# Altium PCB J-Link.PcbDoc
Units mm, origin at the board's own origin, x right, y up, seen from the top; angles counter-clockwise.
Board outline 33.28 x 17.39 mm, 2 copper layers (Top Layer, Bottom Layer); 33 components, 29 nets, 129 pads, 160 vias.
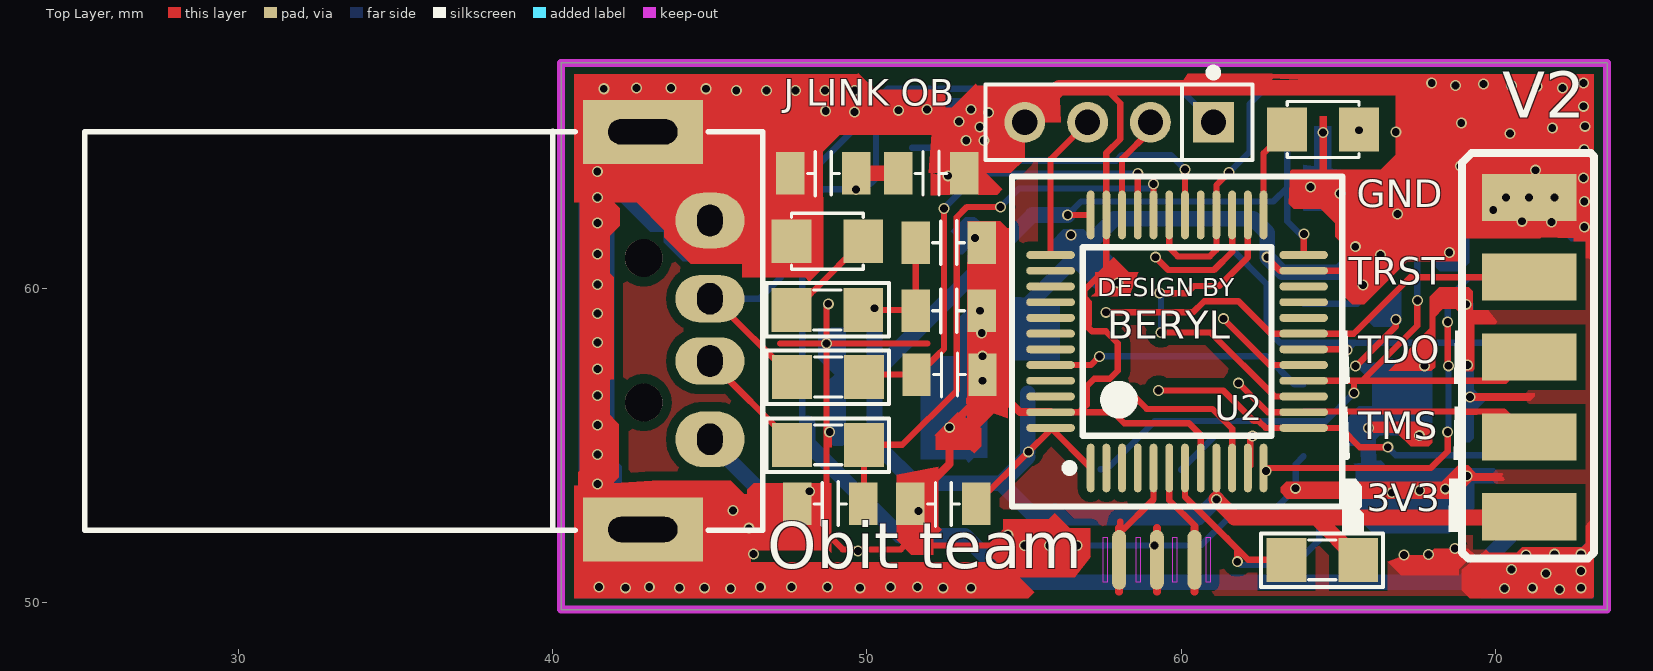
[diagram p0: Top Layer view]
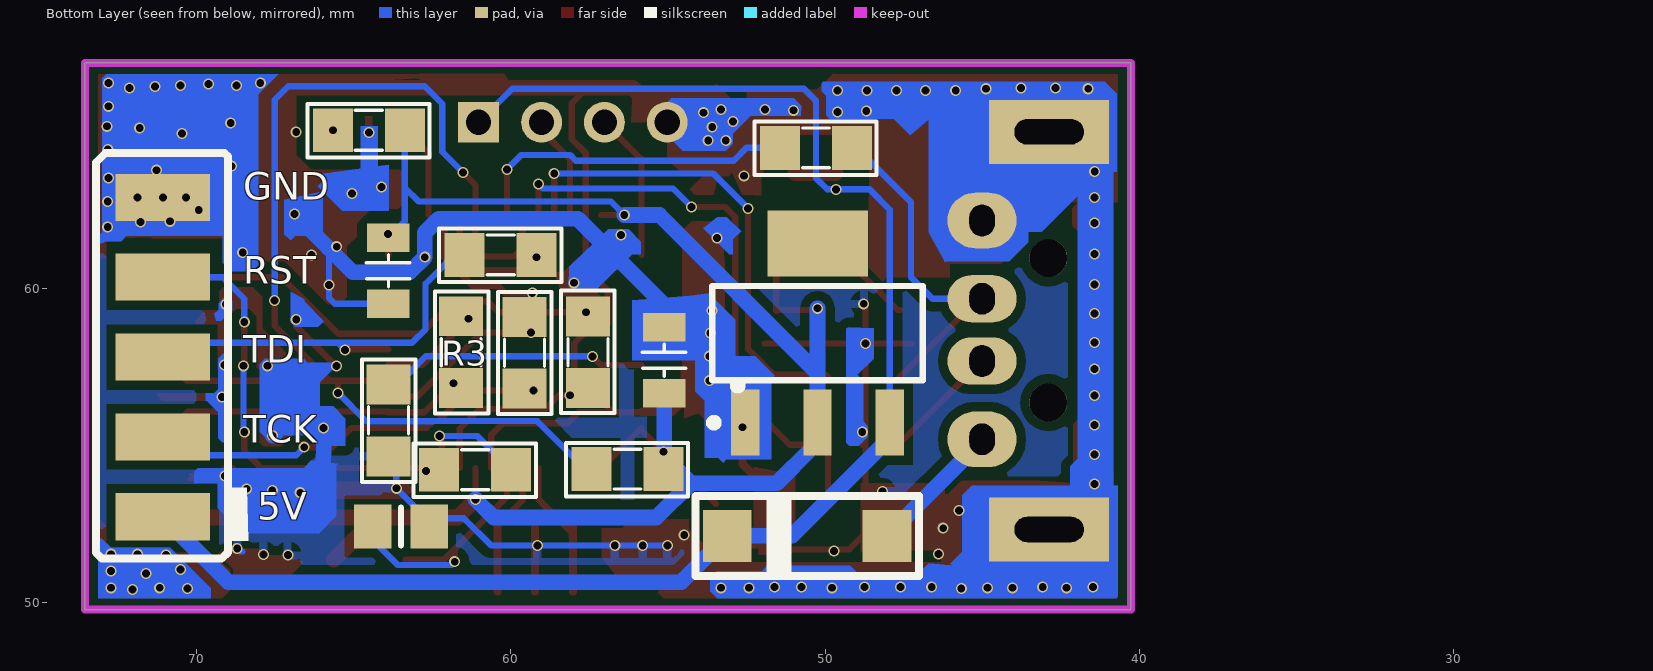
[diagram p1: Bottom Layer view, seen from below]

## Layer stack, top to bottom
Top Solder: solder mask 0.0102, Solder Resist, Dk 3.5
Top Layer: signal copper 0.0356
Dielectric 1: dielectric 0.32, FR-4, Dk 4.8
Bottom Layer: signal copper 0.0356
Bottom Solder: solder mask 0.0102, Solder Resist, Dk 3.5

## Board outline
40.277,49.776 73.553,49.776 73.553,67.17 40.277,67.17

## Design rules (kind name [scope] priority, off if disabled: settings)
Clearance [All] p1: gap=0.2 ignorepadtopadclearanceinfootprint=FALSE
PolygonConnect [All] p1: connectstyle=Relief reliefconductorwidth=0.254 reliefentries=4 polygonreliefangle="90 Angle" airgapwidth=0.254
RoutingVias [All] p1: holewidth=0.25 width=0.35 viastyle="Through Hole" minholewidth=0.25 minwidth=0.35 maxholewidth=0.25 maxwidth=0.35
SolderMaskExpansion [All] p1: expansion=0.102
Width [All] p1: maxlimit=0.8 minlimit=0.2 preferedwidth=0.5
30 further rules are at their usual default settings.

## Classes and differential pairs
component class "J-Link OB": R3 U2

## Components (designator, comment, footprint, x,y, rotation, side; value= is the part's Value field where it differs from the comment)
C1 "CAP" "C 0805" 48.616,63.652 r180 top value=0.1
C2 "CAP" "C 0805" 52.045,63.652 r0 top value=0.1
C3 "CAP" "C 0805" 52.603,61.443 r0 top value=0.1
C4 "CAP" "C 0805" 52.434,53.137 r180 top value=0.1
C5 "CAP" "C 0805" 48.836,53.137 r0 top value=0.1
C6 "CAP" "C 0805" 52.629,57.252 r180 top value=0.1
C7 "CAP" "C 0805" 55.118,57.709 r90 bottom value=0.1
C8 "JP4x1-2.0" J4-C1T 58.023,65.278 r180 top
C9 "CAP" "C 0805" 52.603,59.284 r180 top value=0.1
C10 "CAP" "C 0805 INSTEK" 63.492,52.417 r0 bottom value=0.1
C11 "CAP" "C 0805" 63.895,60.555 r90 bottom value=0.1
D1 "SS24" DO-214AC 50.571,52.121 r0 bottom
H1 "Conn5" CONN5 65.837,50.394 r0 top
H2 "Conn5" CONN5 76.302,50.394 r180 bottom
LED1 "LED SMD" SM-LED-0805-Blue 49.886,61.493 r180 top
LED2 "LED SMD" SM-LED-0805-Blue 65.659,65.049 r180 top
P? "USB" "USB TYPE-A Plug" 43.942,58.649 r90 top
R1 "100" SM-RES-0805 57.545,59.106 r270 bottom
R2 "100" SM-RES-0805 61.468,61.062 r180 bottom
R3 "100" SM-RES-0805 61.579,56.821 r90 bottom
R4 "10k" SM-RES-0805 49.886,59.309 r180 top
R5 "100" SM-RES-0805 59.562,56.804 r90 bottom
R6 "100" SM-RES-0805 62.28,54.223 r180 bottom
R7 "47k" SM-RES-0805 57.432,54.244 r180 bottom
R7 "100" SM-RES-0805 47.625,55.016 r0 top
R8 "100" SM-RES-0805 47.625,57.175 r0 top
R9 "1.5K" SM-RES-0805 51.435,64.465 r180 bottom
R10 "10k" SM-RES-0805 63.348,51.359 r0 top
R11 "10k" SM-RES-0805 65.659,65.024 r180 bottom
R70 "100" SM-RES-0805 63.89,54.651 r90 bottom
U1 "AMS1117" "SOT 223" 50.241,58.572 r180 bottom
U2 "STM32F103xx_LQFP48" LQFP48 59.87,58.305 r0 top
Y1 "" RESONATOR-SMD-3.2X1.3 59.227,51.359 r0 top

## Footprints (in the part's own frame and the unit in brackets; to place one, negate y for a bottom-side part, rotate by r counter-clockwise, add the part's x,y. Pads: shape width x height; smd on the part's side, far side on the other; paste and mask are expansions set on the pad)
"C 0805" [mm]
  rect 0.9x1.35 smd: 1(-1.05,0) 2(1.05,0)
  silkscreen extent -0.51,-0.69 0.51,0.71, body extent -1,-0.63 1,0.64, height 0.57
"C 0805 INSTEK" [mm] "Copy-From-IST-Lib"
  rect 1.2x1.4 smd: 1(-0.9,0) 2(0.9,0)
  silkscreen extent 0,-0.6 0,0.6, body extent -1,-0.63 1,0.64, height 0.57
CONN5 [mm]
  rect 3x1.5 smd: 1(5.232,2.337) 2(5.232,4.877) 3(5.232,7.417) 4(5.232,9.957) 5(5.232,12.497)
  silkscreen extent 3.1,1 7.3,13.9
DO-214AC [mm]
  rect 1.55x1.65 smd: 1(-2.54,0) 2(2.54,0)
  silkscreen extent -3.56,-1.27 3.56,1.27, body extent -2.59,-1.29 2.61,1.31, height 2.4
J4-C1T [mm] "4p, 1 row, straight, gold plating"
  rect 1.3x1.3 hole 0.8: 1(-3,0)
  round 1.3 hole 0.8: 2(-1,0) 3(1,0) 4(3,0)
  silkscreen extent -4.25,-1.71 4.25,1.2, body extent -4.25,-1.2 4.25,1.2, height 4.31
LQFP48 [mm]
  oval 0.25x1.55 smd: 1(-2.75,-4.025) 2(-2.25,-4.025) 3(-1.75,-4.025) 4(-1.25,-4.025) 5(-0.75,-4.025) 6(-0.25,-4.025) 7(0.25,-4.025) 8(0.75,-4.025) 9(1.25,-4.025) 10(1.75,-4.025) 11(2.25,-4.025) 12(2.75,-4.025) 25(2.75,4.025) 26(2.25,4.025) 27(1.75,4.025) 28(1.25,4.025) 29(0.75,4.025) 30(0.25,4.025) 31(-0.25,4.025) 32(-0.75,4.025) 33(-1.25,4.025) 34(-1.75,4.025) 35(-2.25,4.025) 36(-2.75,4.025)
  oval 1.55x0.25 smd: 13(4.025,-2.75) 14(4.025,-2.25) 15(4.025,-1.75) 16(4.025,-1.25) 17(4.025,-0.75) 18(4.025,-0.25) 19(4.025,0.25) 20(4.025,0.75) 21(4.025,1.25) 22(4.025,1.75) 23(4.025,2.25) 24(4.025,2.75) 37(-4.025,2.75) 38(-4.025,2.25) 39(-4.025,1.75) 40(-4.025,1.25) 41(-4.025,0.75) 42(-4.025,0.25) 43(-4.025,-0.25) 44(-4.025,-0.75) 45(-4.025,-1.25) 46(-4.025,-1.75) 47(-4.025,-2.25) 48(-4.025,-2.75)
  silkscreen extent -5.25,-5.25 5.25,5.25, body extent -4.5,-4.5 4.5,4.5, height 1.5
RESONATOR-SMD-3.2X1.3 [mm]
  rrect100% 0.45x1.905 smd: 1(-1.2,0) 2(0,0) 3(1.2,0)
  Top Layer lines w0.254: -1.2,-1.016 -1.2,0 -1.2,0.533 -1.2,0.654 -1.2,0.813 -1.2,1.016 ; 0,-1.016 0,0 0,0.203 0,0.254 0,0.457 0,0.762 0,1.016 ; 1.2,-1.016 1.2,0 1.2,1.016
  Top Layer keep-out region: -1.702,-0.711 -1.702,0.711 -1.575,0.711 -1.575,-0.711
  Top Layer keep-out region: -0.66,-0.711 -0.66,0.711 -0.533,0.711 -0.533,-0.711
  Top Layer keep-out region: 0.508,-0.711 0.508,0.711 0.635,0.711 0.635,-0.711
  Top Layer keep-out region: 1.575,-0.711 1.575,0.711 1.702,0.711 1.702,-0.711
SM-LED-0805-Blue [mil]
  rect 50x55 smd: 1(0,0) 2(90,0)
  silkscreen extent 0,-35 90,35, body extent 5,-25 85,25, height 43
SM-RES-0805 [mil]
  rect 50x55 smd: 1(0,0) 2(90,0)
  silkscreen extent -32,-34 121,33, body extent 6,-25 84,25, height 31
"SOT 223" [mm]
  rect 0.9x2.1 smd: 1(-2.3,-2.85) 2(0,-2.85) 3(2.3,-2.85)
  rect 3.2x2.1 smd: 4(0,2.85)
  silkscreen extent -3.43,-2.97 3.35,1.5, body extent -3.25,-3.66 3.25,3.3, height 1.66
"USB TYPE-A Plug" [mil] "http://www.google.com/imgres?imgurl=http://ntcdistributing.com/wp-content/uploads/2013/06/ura-1001r.jpg&imgrefurl=http://ntcdistributing.com/product/upa-1001r/&h=468&w=576&tbnid=tjgdQPVHuRbmKM:&zoom=1&docid=JG2J_tnvzre7yM&ei=efmdVfbbF8OwuAS-grugDA&tbm=isch&ved=0CCMQMygHMAc"
  oval 70x86.61 hole 31.5 slot 39.37 at 0 deg: 1(-136,-42) 4(138,-42)
  oval 59.06x86.61 hole 31.5 slot 39.37 at 0 deg: 2(-38,-42) 3(40,-42)
  rect 80x150 hole 31.5 slot 86.61 at 90 deg: 5(-249,42) 6(249,42)
  round 47.24 hole 47.24: H(-90,41) H(91,41)
  silkscreen extent -250,-108 250,741, body extent -247,-47 249,737, height 130

## Part data
C1 C2 C3 C4 C5 C6 C7 C9 C10 C11: library part CAP_NP
C8: "WR-PHD 2.00 mm Socket Header", Manufacturer="Würth Elektronik eiSos GmbH", partNo=62000411821, ComponentLink1 Description=Manufacturer, ComponentLink1URL=http://www.we-online.com, ComponentLink2 Description=Datasheet, ComponentLink2URL=http://katalog.we-online.de/em/datasheet/6200xx11821.pdf, Created by="Karrer Zheng", Created Date="2 April 2013", NoPins=04
D1: library part "Diode Schottky", "Diode Schottky", Part Number="LED 3 ly Single Colour"
LED1 LED2: library part "LED SMD 0805"
R1 R2 R3 R4 R5 R6 R7 R7 R8 R9 R10 R11 R70: library part "Res SMD", "Res"
U1: library part AMS117
U2: "STM32 ARM-based 32-bit MCU with 64 Kbytes Flash, 48-pin LQFP, Industrial Temperature", ComponentLink1Description="Manufacturer Link", ComponentLink1URL=www.st.com/stm32, ComponentLink2Description=Datasheet, ComponentLink2URL=http://www.st.com/stonline/products/literature/ds/13587.pdf, DatasheetVersion="rev6, Mar-2008", PackageDescription="48-Pin Low-Profile Quad Flat Pack, 7 x 7 mm Body, 0.5 mm Pitch (LQFP48)", PackageReference=LQFP48, PackageVersion=Mar-2008, Published=30-May-2008, Publisher="Altium Limited"
Y1: library part RESONATOR-8MHZSMD_3.2X1.3, PROD_ID=XTAL-08895

## Via types
v1: diameter 0.35, hole 0.25, Top Layer to Bottom Layer, tented both sides, 160 vias

## Nets (pads, with @x,y where several pads share a name; then routed paths per layer and width w, separated by ;. In a path a pad name is that pad's centre, name@x,y a point inside that pad or via, vN(x,y) a via of type N, cw(c..) or ccw(c..) an arc to the next point about the centre after c; other vN are vias at no path point)
5V: C1.1 C2.1 C8.1 D1.2 H2.1 U1.3 | length 51
  Top Layer w0.2: C2.1@50.944,63.652 50.969,63.678 C2.1
  Top Layer w0.5: C1.1 C2.1@50.944,63.652
  Bottom Layer w0.2: U1.3@47.941,55.717 U1.3 47.941,62.495 48.59,63.144 v1(49.657,63.144) 49.936,63.144 50.292,63.5 50.292,65.964 50.673,66.345 59.956,66.345 C8.1
  Bottom Layer w0.5: U1.3@48.119,55.702 48.119,55.056 51.054,52.121 D1.2 54.588,50.644 68.983,50.644 H2.1
GND: C1.2 C2.2 C3.2 C4.2 C5.1 C6.1 C7.2 C8.4 C9.1 C10.1 C11.1 H1.5 H2.5 LED1.2 P?.4 P?.5 P?.6 R70.1 U1.1 U2.8 U2.23 U2.35 U2.47 Y1.2 | length 181.8
  Top Layer w0.2: 47.243,58.242 v1(48.717,58.242) ; C5.1 49.233,51.689 51.079,51.689 51.079,51.691 51.384,51.996 ; 48.635,53.695 48.717,53.777 v1@48.717,55.524 ; v1(48.773,59.503) 48.717,59.447 v1(48.717,58.242) ; v1(48.819,55.423) v1@48.717,55.524 ; C4.2 51.384,51.996 ; 51.927,58.242 v1(48.717,58.242) ; C2.2 53.397,63.652 C8.4 ; v1(53.605,59.284) C9.1 ; C6.1@53.653,57.861 v1(53.679,57.836) C6.1 v1(53.679,57.057) ; v1(55.016,51.816) 51.206,51.816 51.384,51.994 51.384,51.996 ; U2.47 56.766,56.055 ; 57.607,66.345 58.064,65.888 58.064,64.745 57.62,64.301 U2.35 57.62,60.63 56.921,59.93 56.921,58.872 57.163,58.63 57.606,58.63 57.985,58.251 57.985,57.375 57.732,57.122 57.239,57.122 56.998,56.881 56.998,56.286 56.766,56.055 ; U2.8 60.62,55.331 60.249,55.702 58.191,55.702 57.839,56.055 56.766,56.055 ; v1(62.738,60.985) 62.738,60.961 63.144,60.555 U2.23 65.914,60.555 ; v1(65.547,57.53) 65.577,57.53 66.827,58.78 v1(66.827,59.004) ; v1(65.786,60.096) 65.786,60.427 65.914,60.555 ; v1(66.339,61.061) v1@66.456,61.178 ; v1@66.38,61.02 65.914,60.555 ; 66.456,61.359 v1@66.456,61.178 ; v1@66.458,61.18 v1@66.456,61.178 ; v1@48.717,55.524 v1(48.717,58.242)
  Top Layer w0.254: C1.2 47.566,61.527 LED1.2 ; C4.2@51.359,53.137 52.626,54.404 v1(52.626,55.575) 53.679,56.628 v1(53.679,57.057) ; C3.2 C9.1 v1(53.653,58.572) 53.653,57.861 53.653,57.277 C6.1 54.876,56.055 U2.47
  Top Layer w0.5: P?.4 46.507,63.652 C1.2 49.191,65.278 49.354,65.441 ; C8.4 56.123,66.378 67.582,66.378 v1(71.069,62.89) 70.536,62.357 v1(66.878,62.357) ; v1(65.538,61.32) 65.538,61.89
  Top Layer w0.8: P?.5 v1(41.427,53.772) v1(41.427,54.712) v1(41.427,55.651) v1(41.427,56.591) v1(41.427,57.429) v1(41.427,58.268) v1(41.427,59.195) v1(41.427,60.122) v1(41.427,61.087) v1(41.427,62.078) v1(41.427,62.89) 41.427,63.705 v1(41.424,63.708) 41.61,63.708 P?.6 ; P?.4 45.009,62.84 P?.6 ; v1@46.711,66.294 v1(46.812,66.294) ; v1@47.65,66.294 v1(47.727,66.294) ; 49.191,65.278 53.594,65.278 C8.4 ; 49.354,65.441 43.343,65.441 P?.6
  Bottom Layer w0.2: v1@49.606,65.532 v1(49.606,65.608) ; v1(53.162,64.694) v1@53.238,64.694 ; v1(55.016,51.816) v1(55.804,51.816) v1(56.693,51.816) v1(59.157,51.816) 60.63,51.816 61.493,52.68 62.687,52.68 v1(63.641,53.634) 63.641,54.402 R70.1 ; C11.1 65.601,59.505 65.786,59.69 v1(65.786,60.096) 65.786,61.265 65.802,61.28 ; v1(65.547,57.53) v1(67.742,57.531) v1(67.742,57.531) ; 68.534,51.625 68.611,51.625 v1(68.704,51.718) ; v1@70.46,51.054 v1(70.51,51.054) ; v1(71.323,66.421) v1@71.349,66.421 ; v1(72.822,64.414) v1@72.822,64.44
  Bottom Layer w0.5: U1.1@52.719,55.702 52.719,56.732 54.746,58.759 C7.2 55.118,59.461 57.867,62.21 62.289,62.21 62.738,61.761 v1(62.738,60.985) 63.221,60.503 65.024,60.503 65.786,61.265 ; 65.802,61.28 v1(66.878,62.357) ; 65.964,54.469 65.964,54.666 65.948,54.681 65.948,55.534 v1(65.964,55.55) 65.979,55.565 67.317,55.565 v1(67.575,55.307) ; v1(70.333,62.89) v1(69.926,62.484) 70.663,62.484 v1(71.069,62.89) v1(71.882,62.89)
  Bottom Layer w0.8: P?.5 41.58,53.619 41.58,54.712 41.58,57.429 41.58,59.195 41.58,62.078 41.58,63.552 v1(41.424,63.708) 41.61,63.708 P?.6 45.009,62.84 P?.4
  other v1: 72.034,50.419 45.669,50.444 70.282,50.444 42.316,50.47 44.044,50.47 44.831,50.47 49.784,50.47 52.426,50.47 53.315,50.47 71.171,50.47 72.72,50.47 41.478,50.495 43.078,50.495 46.609,50.495 47.6,50.495 48.743,50.495 50.749,50.495 51.613,50.495 71.603,50.927 72.72,51.003 67.089,51.509 70.968,51.511 46.39,51.54 67.87,51.532 71.882,51.537 72.72,51.537 49.715,51.642 54.483,52.146 46.243,52.363 51.638,52.908 45.743,52.923 66.7,53.492 48.177,53.538 67.589,53.569 68.402,53.619 69.088,54.026 69.19,56.54 69.113,57.556 69.063,59.487 57.988,60.173 68.529,61.138 53.442,61.595 56.49,61.697 72.823,61.949 71.78,62.103 70.841,62.128 72.823,62.763 65.049,63.017 64.11,63.221 72.796,63.5 52.578,63.576 71.272,63.754 68.885,63.881 53.721,64.694 70.46,64.922 64.516,64.948 66.827,64.973 71.806,65.1 53.594,65.126 72.847,65.151 68.91,65.253 52.934,65.303 53.873,65.583 48.692,65.634 51.003,65.659 51.918,65.684 53.315,65.684 72.796,65.786 45.847,66.294 48.666,66.294 49.606,66.294 41.631,66.345 44.882,66.345 42.672,66.37 43.764,66.37 72.136,66.37 68.732,66.446 70.51,66.446 69.621,66.497 67.97,66.523 72.796,66.523
LED: LED2.2 U2.25 | length 3
  Top Layer w0.2: U2.25 62.62,64.297 LED2.2
NetC10_2: C10.2 R10.1 U2.7 | length 8.8
  Top Layer w0.2: U2.7 60.12,53.367 61.443,52.045 ; 61.468,52.045 61.443,52.045 ; v1(61.785,51.298) 61.785,51.702 ; R10.1 62.128,51.359 61.785,51.702 ; 61.443,52.045 61.785,51.702
  Bottom Layer w0.2: v1(61.785,51.298) 61.889,51.194 63.598,51.194 64.392,51.988 C10.2
NetD1_1: D1.1 P?.1 | length 4.7
  Top Layer w0.3: P?.1@45.009,54.813 P?.1
  Bottom Layer w0.3: P?.1@45.009,55.143 P?.1
  Bottom Layer w0.5: P?.1@45.009,55.143 D1.1
NetLED1_1: LED1.1 R4.2 | length 3.2
  Top Layer w0.2: R4.2 47.701,59.309 48.242,59.85 48.242,59.908 48.291,59.908 49.877,61.493 LED1.1
NetLED2_1: LED2.1 R11.1 | length 0
  Top Layer w0.2: v1(65.659,65.024) LED2.1
NetP?_2: P?.2 R7.1@47.625,55.016 | length 3.8
  Top Layer w0.2: P?.2 47.625,55.067 R7.1@47.625,55.016
NetP?_3: P?.3 R8.1 R9.2 | length 11.8
  Top Layer w0.2: P?.3 45.136,59.665 R8.1
  Bottom Layer w0.2: P?.3 46.584,59.665 47.269,60.35 47.269,62.738 R9.2@49.517,64.986
NetR70_2: R70.2 U2.44 | length 8.5
  Top Layer w0.2: U2.44 57.123,57.555 v1(57.398,57.83)
  Bottom Layer w0.2: v1@57.396,57.835 62.708,57.835 63.606,56.937 R70.2
OSC0: U2.6 Y1.3 | length 2.2
  Top Layer w0.2: U2.6 59.62,53.257 60.455,52.423
OSC1: U2.5 Y1.1 | length 2.8
  Top Layer w0.2: Y1.1@58.058,52.095 58.058,52.216 59.12,53.278 U2.5 ; 58.058,52.375 58.058,52.578
SWDCLK_IN: C8.3 U2.37 | length 4.7
  Top Layer w0.2: U2.37 55.845,64.1 C8.3
"SWDIO IN": C8.2 U2.34 | length 3.3
  Top Layer w0.2: U2.34 58.12,64.115 59.023,65.017 C8.2
"TCK I": H2.2 R5.1 U2.13 | length 12.9
  Top Layer w0.2: v1(59.284,56.744) 61.345,56.744 62.317,55.772 62.469,55.772 62.686,55.555 U2.13 65.07,55.555 65.684,54.94 v1(66.573,54.94)
  Bottom Layer w0.2: v1(66.573,54.94) 66.827,54.686 70.485,54.686 H2.2
"TCK O": R5.2 U2.15 U2.26 | length 11.3
  Top Layer w0.2: v1(59.316,59.843) 60.173,59.843 60.401,60.071 61.214,60.071 62.12,60.977 U2.26 ; v1(59.358,58.588) 60.94,58.588 62.973,56.555 U2.15
  Bottom Layer w0.2: v1(59.316,59.843) 59.309,59.836 59.358,59.787 v1(59.358,58.588)
"TDI I": H2.3 R2.1 U2.18 | length 13.6
  Top Layer w0.2: U2.18 65.262,58.055 v1(65.278,58.039)
  Bottom Layer w0.2: R2.1@61.493,61.29 61.57,61.29 62.713,60.147 62.713,58.699 63.144,58.268 65.507,58.268 ; v1(65.278,58.039) 65.507,58.268 ; H2.3@70.587,58.293 H2.3@70.612,58.268 ; H2.3 H2.3@70.612,58.268 ; 65.507,58.268 H2.3@70.612,58.268
"TDI O": R2.2 U2.27 | length 4
  Top Layer w0.2: v1(59.182,60.985) 59.588,60.579 61.043,60.579 61.62,61.156 U2.27
"TDO I": H1.3 R7.1@57.432,54.244 U2.16 U2.28 U2.31 | length 40.2
  Top Layer w0.2: U2.31 59.62,61.284 59.893,61.011 60.909,61.011 61.12,61.222 U2.28 61.12,63.279 v1(61.519,63.678) ; U2.16 65.499,57.055 ; v1(65.499,56.67) 65.499,57.055 ; v1(67.513,59.614) 67.513,58.807 65.761,57.055 ; H1.3 70.314,57.055 65.761,57.055 ; 65.499,57.055 65.761,57.055
  Bottom Layer w0.2: R7.1@57.432,54.244 57.633,54.244 59.161,55.772 62.469,55.772 62.476,55.765 64.594,55.765 v1(65.499,56.67) ; v1(61.519,63.678) 62.179,64.338 62.179,65.862 62.738,66.421 67.081,66.421 67.513,65.989 v1(67.513,59.614)
"TMS I": H1.2 R3.1 U2.14 | length 10
  Top Layer w0.2: v1(61.824,56.977) 61.83,56.977 62.752,56.055 U2.14 63.916,56.076 68.983,56.076 68.993,56.065 69.386,56.065 69.397,56.076 70.264,56.076 H1.2
"TMS O": R3.2 U2.17 | length 3.2
  Top Layer w0.2: v1(61.341,59.03) 62.816,57.555 U2.17
"TRES I": H2.4 R6.1 U2.12 | length 14
  Top Layer w0.2: U2.12 v1@62.814,54.28 ; v1(62.695,54.182) 62.717,54.182 v1@62.814,54.28 ; v1(68.478,55.423) 68.478,54.813 67.945,54.28 v1@62.814,54.28 ; v1(68.478,58.928) 68.478,57.556 v1(68.504,57.531)
  Bottom Layer w0.2: v1(68.478,55.423) 68.504,55.448 v1(68.504,57.531) ; v1(68.478,58.928) 68.478,59.665 69.164,60.35 H2.4
"TRES O": R6.2 U2.11 | length 3.8
  Top Layer w0.2: U2.11 62.195,54.356 62.195,55.22 v1(62.272,55.297)
  Bottom Layer w0.2: R6.2 61.068,55.297 v1@62.272,55.296
"TRST I": H1.4 R1.1 U2.19 | length 14.8
  Top Layer w0.2: v1(57.607,59.233) 60.376,59.233 60.731,59.588 61.824,59.588 62.857,58.555 U2.19 65.489,58.555 67.285,60.35 H1.4
"TRST O": R1.2 U2.10 | length 5.2
  Top Layer w0.2: v1(58.112,56.593) 58.469,56.593 58.903,56.159 60.985,56.159 61.62,55.524 U2.10
UD+: C6.2 R8.2 U2.33 | length 16.4
  Top Layer w0.2: R8.2 49.987,57.252 C6.2 ; 52.324,57.946 C6.2@51.63,57.252 ; v1(52.451,62.535) 52.457,62.528 52.457,58.071 51.638,57.252 C6.2@51.63,57.252 ; U2.33 v1(58.62,63.65) ; C6.2 51.604,57.226 C6.2@51.63,57.252 ; C6.2 C6.2@51.63,57.252
  Bottom Layer w0.2: v1(52.451,62.535) 53.566,63.65 v1(58.62,63.65)
UD+UP: R9.1 U2.30 | length 10.6
  Top Layer w0.2: U2.30 60.122,62.331 v1(60.122,63.779)
  Bottom Layer w0.2: R9.1 52.502,64.465 52.908,64.059 57.937,64.059 58.115,64.237 59.665,64.237 v1(60.122,63.779)
UD-: C5.2 R7.2@49.911,55.016 U2.32 | length 18.7
  Top Layer w0.2: C5.2 49.911,53.162 49.911,55.016 51.13,55.016 52.857,56.744 52.857,62.255 53.188,62.586 v1(54.254,62.586) ; U2.32 v1(59.12,63.311)
  Bottom Layer w0.2: v1(54.254,62.586) 54.843,63.175 58.984,63.175 v1(59.12,63.311)
VCC: C3.1 C4.1 C7.1 C9.2 C11.2 H1.1 R4.1 R7.2@55.146,54.244 R10.2 R11.2 U1.2 U2.1 U2.9 U2.24 U2.36 U2.48 | length 65.8
  Top Layer w0.2: R4.1@50.241,59.309 51.528,59.309 C9.2 C3.1 ; C4.1 v1(55.143,54.796) 55.845,55.498 U2.48 U2.1 ; v1(56.39,62.33) U2.36 ; v1(61.12,53.281) U2.9 ; U2.24 63.895,61.711 v1(63.906,61.722) ; 66.98,52.705 67.005,52.73 H1.1
  Top Layer w0.5: v1(61.12,53.281) 61.697,52.705 64.287,52.705 ; R10.2 64.287,52.705 ; H1.1 71.044,52.705 66.98,52.705 64.287,52.705
  Bottom Layer w0.2: v1(56.39,62.33) 56.82,62.76 62.938,62.76 63.373,63.195 ; R11.2 63.373,63.195 ; C11.2 63.373,62.127 63.373,63.195
  Bottom Layer w0.5: U1.2 50.241,57.328 ; v1(50.241,59.36) 50.241,57.328 ; U1.2@50.419,55.702 50.419,54.915 51.537,53.797 54.28,53.797 ; R7.2@55.118,54.635 54.28,53.797 ; R7.2@55.118,54.796 C7.1 ; v1(56.39,62.33) 55.269,62.33 50.267,57.328 50.241,57.328 ; v1(61.12,53.281) 60.544,52.705 55.372,52.705 54.28,53.797
pads on no net: P?.H U1.4 U2.2 U2.3 U2.4 U2.20 U2.21 U2.22 U2.29 U2.38 U2.39 U2.40 U2.41 U2.42 U2.43 U2.45 U2.46

## Polygon pours and split planes (outlines as drawn)
GND on Top Layer "Bottom Overlay-No Net" (solid, pour order 8): 40.277,67.17 40.277,49.776 73.553,49.776 73.553,67.17
GND on Bottom Layer "Bottom Overlay-No Net" (solid, pour order 10): 40.277,67.17 40.277,49.776 73.553,49.776 73.553,67.17

## Keep-outs
Keep-Out Layer:
  the board outline again, w0.254

## Other copper
Top Layer:
  region net GND: 65.985,55.758 67.676,55.758 67.993,55.441 67.993,55.089 67.875,54.971 67.296,54.971 66.862,55.405 66.109,55.405 65.964,55.55
  region net GND: 69.603,54.12 69.376,54.12 69.126,54.37 68.815,54.37 68.295,53.85 63.335,53.85 63.16,53.675 63.16,53.509 63.361,53.308 68.668,53.308 69.24,53.88 69.597,53.88
  region net GND: 70.623,56.66 70.622,56.659 69.308,56.659 69.19,56.54 69.19,56.488 69.278,56.4 69.298,56.42 70.669,56.42
  region net GND: 68.89,59.231 68.89,57.473 68.999,57.364 69.271,57.364 69.322,57.415 69.322,58.992 69.236,59.078
  region net GND: 66.609,57.37 67.903,58.724 67.903,59.727 68.203,60.027 69.148,60.027 69.274,59.901 69.274,59.314 69.387,59.2 69.294,59.107 69.294,58.96 69.124,58.96 68.74,59.344 68.325,59.344 68.08,59.099 68.08,57.489 67.961,57.37
  region net GND: 64.408,64.432 64.408,65.464 64.624,65.464 64.624,64.315 64.536,64.227 64.536,64.195
  region net GND: 70.279,51.58 70.673,51.58 70.846,51.753 72.736,51.753 73.01,52.027 73.13,52.027 73.13,50.191 73.08,50.141 73.079,50.142 69.776,50.142 69.445,50.473 69.519,50.547 69.519,51.008
  region net GND: 68.992,60.86 68.066,60.86 67.723,61.203 67.723,61.577 67.799,61.577 68.068,61.846 68.229,61.685 69,61.685
  region net GND: 58.345,59.743 57.141,59.743 57.26,59.862 57.26,60.504 57.384,60.504 57.861,60.981 58.328,60.514 58.628,60.514
  region net GND: 48.66,54.917 48.66,55.435 48.733,55.508 48.876,55.366 48.876,54.938
  region net GND: 63.477,63.715 63.525,63.763 65.712,63.763 66.085,63.39 65.8,63.105 65.8,62.486 65.324,62.486 64.904,62.066 64.444,62.526 63.58,62.526 63.422,62.684
  region net GND: 60.205,66.823 62.902,66.823 62.985,66.74 62.72,66.475 59.989,66.475 59.933,66.419
  region net GND: 60.205,66.823 60.214,66.814 73.121,66.814 73.13,66.805 73.13,61.404 73.111,61.404 73.044,61.337 72.881,61.5 72.494,61.5 72.494,61.804 71.403,62.895 67.939,62.895 67.939,63.27 66.829,64.38 66.829,66.309 66.665,66.473
  region net GND: 52.044,63.668 52.036,63.66 52.036,62.949 52.233,62.949 52.375,63.091 52.404,63.091 52.404,63.542 52.416,63.554
  region net GND: 53.613,62.13 53.205,62.13 53.205,61.934
  region net GND: 53.199,60.769 53.199,55.496 53.36,55.335 54.549,56.524 54.588,56.524 54.588,57.391 54.548,57.431 54.548,61.904 54.473,61.904 54.247,62.13 53.44,62.13 53.44,62.024 53.293,61.877
  region net GND: 53.157,56.323 53.157,56.503 53.35,56.696 54.269,56.696 54.631,56.334 54.481,56.184 54.481,55.864
  region net GND: 52.89,56.055 52.159,55.325 52.199,55.285 52.199,54.868 53.292,54.868 53.413,54.747 53.64,54.974 53.64,55.55
  region net GND: 50.946,54.066 50.946,51.991 51.412,51.525 52.115,51.525 52.115,52.048 52.384,52.317 52.276,52.425 52.276,54.317
  region net GND: 57.117,51.45 57.11,51.457 57.11,52.368 56.459,52.368 55.981,52.846 55.789,52.654 54.334,52.654 54.334,52.334 53.888,51.887 53.888,51.4 54.038,51.4 54.752,50.686 54.877,50.811 56.61,50.811
  region net GND: 40.691,50.343 40.691,50.14 40.693,50.138 55.141,50.138 55.326,50.323 54.364,51.285 46.185,51.285 46.041,51.429
  region net GND: 40.988,63.703 42.145,62.546 42.145,61.993 41.632,61.48 41.632,60.663 41.946,60.349 41.946,57.102 41.855,57.102 41.653,56.9 41.653,56.065 41.727,56.065 42.114,55.678 42.114,53.981 41.496,53.363 41.287,53.572 40.826,53.572 40.826,54.148 40.868,54.19 40.868,63.386
  region net GND: 40.691,66.802 49.698,66.802 49.732,66.836 50.261,66.307 52.488,66.307 52.488,65.343 52.674,65.157 52.539,65.022 43.844,65.022 43.59,65.276
  region net GND: 53.538,62.977 54.143,62.977 54.309,63.143 53.612,63.84 53.585,63.84 53.397,63.652
  region net GND: 52.644,62.979 52.263,62.979 52.263,63.744 52.38,63.861 53.035,63.861
  region net GND: 48.616,60.656 48.167,60.207 48.032,60.342 46.036,60.342 46.036,62.927 46.507,63.398 46.507,65.329 48.412,65.329 48.59,65.151
  region net GND: 46.406,53.797 46.203,53.594 46.203,51.664 48.793,51.664 48.87,51.587 48.87,53.797
  region net GND: 40.691,53.71 40.691,50.343 46.101,50.343 46.304,50.546 46.304,53.442 46.101,53.442 45.669,53.873 43.18,53.873
  region net GND: 40.691,66.802 40.691,62.73 42.68,62.73 43.561,61.849 43.561,61.62 44.399,60.782 46.076,60.782 46.507,61.214 46.507,66.319 46.355,66.472
  region net GND: 56.166,65.278 55.023,65.278 54.896,65.405 55.016,65.525 55.016,66.446 56.055,66.446 56.123,66.378
  region net GND: 51.968,63.678 54.585,63.678 55.016,64.11 55.016,66.446 53.518,66.446 53.467,66.497 52.705,65.735 52.121,65.735
  region net GND: 71.45,61.62 71.425,61.595 65.227,61.595 65.227,63.246 65.557,63.576 67.742,63.576 68.859,64.694 69.012,64.541 72.568,64.541 73.05,64.059 73.05,61.578
  region net GND: 57.153,59.589 57.153,58.819 57.108,58.774 57.081,58.801 56.928,58.801 56.928,59.576 56.878,59.626 56.99,59.738 56.99,59.76
  region net GND: 64.904,62.066 64.904,61.643 65.22,61.327 65.22,59.719 65.45,59.489 65.821,59.489 67.192,60.86 68.066,60.86 68.066,61.137 68.614,61.685 68.091,62.208 68.091,62.597
  region net GND: 64.904,62.066 64.904,62.512 64.878,62.538 64.932,62.592 65.602,62.592 65.602,61.954 65.538,61.89
  region net GND: 66.829,64.38 66.829,64.245 66.347,63.763 65.712,63.763 65.712,63.436 65.664,63.388 65.884,63.168 67.838,63.168 67.977,63.307 67.97,63.314 67.97,64.156
  region net GND: 64.408,64.432 64.408,63.414 64.544,63.278 64.925,63.278 64.624,63.579 64.624,64.315
  region net GND: 69.603,54.12 70.216,54.12 70.254,54.082 70.22,54.048 70.22,53.981 70.248,53.981 70.301,53.928 70.253,53.88 69.462,53.88 69.408,53.934
  region net GND: 70.623,56.66 70.624,56.661 71.25,56.661 71.25,56.56 71.11,56.42 70.574,56.42 70.533,56.461
  region net GND: 69.773,59.3 69.773,59.301 69.136,59.301 69.136,58.973 69.124,58.96 69.224,58.86 69.986,58.86 70.055,58.929
  region net GND: 73.13,61.404 73.118,61.392 73.118,60.971 73.105,60.971 73.027,60.893 72.968,60.952 72.869,60.952 72.869,61.572 72.82,61.621
  region net GND: 72.869,52.435 72.873,52.431 72.873,51.812 72.941,51.812 73.005,51.748 73.13,51.873 73.13,52.573 73.048,52.655
  region net GND: 69.703,51.68 69.803,51.58 70.279,51.58 70.279,51.237 69.776,50.734 69.776,50.142 69.176,50.142 68.931,50.387 68.931,51.041
  region net GND: 67.089,51.509 67.847,51.509 68.056,51.718 69.14,51.718 69.317,51.541 68.829,51.053 68.829,50.867 67.006,50.867 66.569,51.304
Bottom Layer:
  region net GND: 40.897,64.846 40.836,64.785 40.836,53.467 41.061,53.242 42.2,53.242 42.2,54.339 41.743,54.796 41.743,62.058 41.82,62.135 41.812,62.143 41.812,63.948
  region net GND: 48.451,58.721 48.451,57.763 48.461,57.763 48.975,57.249 48.791,57.065 48.791,55.761 48.641,55.611 48.641,55.273 48.928,54.986 48.929,54.987 49.234,54.987 49.324,55.077 49.324,58.71 49.271,58.763
  region net GND: 53.698,59.832 52.86,58.994 52.86,57.827 52.221,57.827 51.603,57.209 51.71,57.102 51.71,54.551 53.147,54.551 53.245,54.453 53.401,54.609 53.834,54.609 53.834,56.423 54.13,56.719 54.13,59.163 54.673,59.706
  region net GND: 53.879,61.904 53.057,61.082 52.932,61.082 52.932,61.551 52.672,61.811 53.123,62.262 53.427,62.262
  region net GND: 50.769,65.485 52.365,65.485 52.943,64.907 52.943,64.589 53.167,64.365 54.532,64.365 54.532,65.103 54.935,65.506 54.402,66.039 51.004,66.039 50.764,65.799
  region net GND: 56.901,61.868 56.25,61.868 55.861,61.479 55.861,61.085 56.141,61.085 57.235,59.991 58.086,59.991 58.15,60.055 58.147,60.679
  region net GND: 67.003,59.886 67.003,58.92 66.86,58.777 66.124,58.777 65.947,58.954 66.572,59.579 66.572,59.643
  region net GND: 63.883,63.926 63.883,62.484 63.903,62.464 65.359,62.464 66.14,63.245 66.006,63.379 66.006,63.639
  region net GND: 64.234,65.152 64.234,63.78 64.769,63.78 64.769,65.152
  region net GND: 69.603,54.12 69.261,54.12 69.205,54.176 68.979,53.951 69.132,53.951 69.203,53.88 69.597,53.88
  region net GND: 70.836,51.74 69.553,50.457 69.553,50.139 73.12,50.139 73.126,50.145 73.126,52.036 73.015,52.036 72.719,51.74
  region net GND: 66.576,57.758 67.821,57.758 67.994,57.585 67.994,57.046 67.787,57.046 67.323,56.582 66.792,57.113 66.144,57.113
  region net GND: 66.514,55.515 65.98,54.981 65.266,54.981 65.266,55.848 65.656,56.238 66.262,56.238
  region net GND: 68.352,54.176 69.205,54.176 69.326,54.055 69.326,53.679 68.786,53.139 68.786,53.01 66.617,53.01 66.451,52.844 66.046,53.249 66.046,54.042
  region net GND: 69.703,56.66 69.431,56.66 69.308,56.783 69.308,57.753 69.122,57.939 68.879,57.939 68.879,57.912 68.879,57.864 68.879,55.191 68.968,55.102 69.188,55.102 69.308,55.222 69.308,56.052 69.676,56.42 69.703,56.42
  region net GND: 72.969,61.441 72.909,61.5 72.398,61.5 72.2,61.698 72.553,62.051 72.553,62.084 72.688,62.084 73.126,61.646 73.126,61.394
  region net GND: 67.405,66.801 68.032,66.174 68.032,60.729 68.226,60.535 68.892,60.535 69.169,60.812 69.169,61.668 69.063,61.774 69.444,62.155 72.263,62.155 72.263,63.983 73,64.719 72.998,64.721 72.998,66.673 72.871,66.8
  region net GND: 40.691,50.673 40.692,50.672 40.692,50.194 40.747,50.139 53.437,50.139 53.655,50.357 53.655,50.809 53.468,50.996 52.023,50.996 51.758,51.261 51.671,51.174 49.209,51.174 48.923,50.888 47.056,50.888 46.699,51.245
  region net GND: 45.324,66.573 50.067,66.574 50.115,66.526 50.115,66.259 49.972,66.116 49.972,65.503 49.862,65.393 47.815,65.393 47.289,64.867
  region net GND: 67.207,62.806 67.207,61.721 67.005,61.519 66.853,61.671 65.989,61.671 65.989,63.017 66.04,63.068
  region net GND: 56.134,59.614 56.134,57.709 53.696,57.709 53.899,57.912 53.899,59.792
  region net GND: 54.339,66.039 54.89,66.039 55.423,65.507 55.296,65.38 55.296,64.948 55.115,64.948 54.532,64.365 54.203,64.694 53.238,64.694
  region net GND: 72.822,61.646 72.796,61.671 68.936,61.671 68.936,65.049 68.682,65.303 72.415,65.303 73,64.719 73,61.773
  region net GND: 40.691,53.71 40.691,50.673 40.869,50.495 45.288,50.495 46.025,51.232 45.644,51.613 45.644,53.416 45.339,53.721
  region net GND: 46.177,60.833 46.152,60.858 44.145,60.858 43.536,61.468 43.536,61.798 43.104,61.798 41.199,63.703 40.716,63.703 40.716,66.192 41.097,66.573 45.999,66.573 46.711,65.862 46.711,61.773
  region net GND: 69.434,59.183 69.298,59.319 69.298,59.526 69.129,59.695 68.979,59.695 68.861,59.577 68.861,59.306 69.207,58.96 69.366,58.96
  region net GND: 66.341,54.524 66.588,54.277 69.952,54.277 70.073,54.156 70.073,53.787 68.528,53.787 68.595,53.679 69.326,53.679 69.326,52.999 68.528,52.201 66.158,52.201 66.134,52.177 65.546,52.765 65.546,54.358 65.488,54.416
  region net GND: 67.994,57.585 67.994,55.435 67.717,55.158 67.29,55.585 65.902,55.585 65.685,55.802 66.075,56.192 66.075,57.001 65.547,57.53 65.574,57.557 67.05,57.557

## Silkscreen, mask and mechanical layers (free items; w line width, h text height)
Top Overlay:
  region: 65.283,58.644 65.281,58.646 65.132,58.646 65.132,56.965 65.165,56.932 65.189,56.956 65.307,56.956 65.364,57.013
  region: 68.717,58.648 68.845,58.648 68.845,57.065 68.867,57.043 68.822,56.998 68.822,56.957 68.691,56.957 68.682,56.966 68.682,57.092
  region: 68.71,56.23 68.964,56.23 68.964,54.724 68.847,54.607 68.847,54.536 68.666,54.536
  region: 65.291,56.231 65.126,56.231 65.067,56.172 65.067,54.651 65.181,54.536 65.319,54.536 65.319,54.552 65.359,54.592
  region: 65.555,53.932 65.154,53.932 65.062,53.84 65.12,53.782 65.12,52.21 65.148,52.182 65.171,52.205 65.811,52.205 65.811,52.824 65.669,52.967 65.75,53.048 65.75,53.701
  region: 68.524,53.932 68.864,53.932 68.864,52.301 68.814,52.25 68.511,52.25
  text "J LINK OB" at 47.357,65.513 h1.45
  text "V2" at 70.212,64.95 h2.5
  text "GND" at 65.58,62.291 h1.5
  text "TRST" at 65.324,59.825 h1.5
  text "DESIGN BY" at 57.328,59.55 h1
  text "BERYL" at 57.648,58.089 h1.52
  text "TDO" at 65.631,57.32 h1.5
  text "TMS" at 65.639,54.902 h1.5
  text "3V3" at 65.905,52.616 h1.5
  text "Obit team" at 46.824,50.613 h2.5
Bottom Overlay:
  region: 68.399,53.648 68.938,53.648 68.998,53.588 68.998,51.972 68.347,51.972
  text "GND" at 68.51,62.535 h1.5
  text "RST" at 68.51,59.861 h1.5
  text "TDI" at 68.51,57.345 h1.5
  text "TCK" at 68.51,54.803 h1.5
  text "5V" at 68.065,52.339 h1.5